# EAGLE board test (EAGLE 6.4)

Size 154.94 x 25.4 mm. Coordinates in mm from the lower left corner, seen from the top.
Outline: 0,0 0,25.4 154.94,25.4 154.94,0 0,0
Copper layers used: 

## Footprints (pad centres in the part's own frame; a part is rotated, then mirrored left to right if it is on the bottom)
0201 = smd 0.3 x 0.3: P$1 -0.3,0; P$2 0.3,0
0402 = smd 0.5 x 0.6: 1 -0.5,0 | smd 0.6 x 0.5: 2 0.5,0
ALL-HOLES = hole 3.26: 43.004,-1.63

## Placement (x,y rotation side)
E$16  [0201]  19.05,10.46 90 top
E$23  [0402]  20.57,10.16 90 top
E$46  [ALL-HOLES]  109.22,19.3 0 top
E$71  [0201]  19.05,10.46 90 bottom

## Library data of the parts
E$16 E$23 E$46 E$71 = Reference Ruler

## Text on the board
tPlace: 0201(0603)\n0402(1005)\n0603(1608)\n0805(2012)